# Altium PCB Modulo_Led_RGB.PcbDoc
Units mm, origin at the board's own origin, x right, y up, seen from the top; angles counter-clockwise.
Board outline 24 x 24 mm, 2 copper layers (Top Layer, Bottom Layer); 5 components, 13 nets, 20 pads, 0 vias.
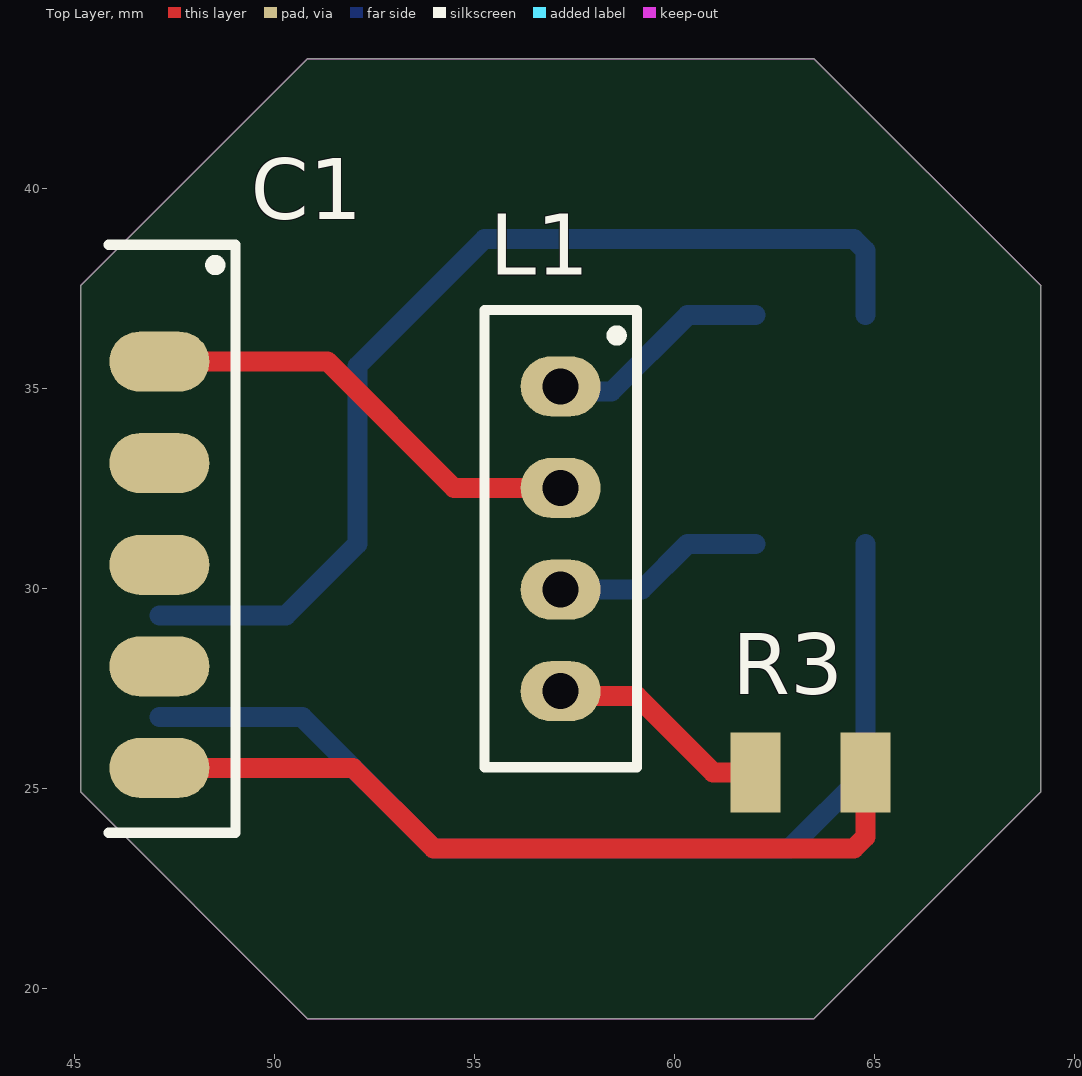
[diagram p0: Top Layer view]
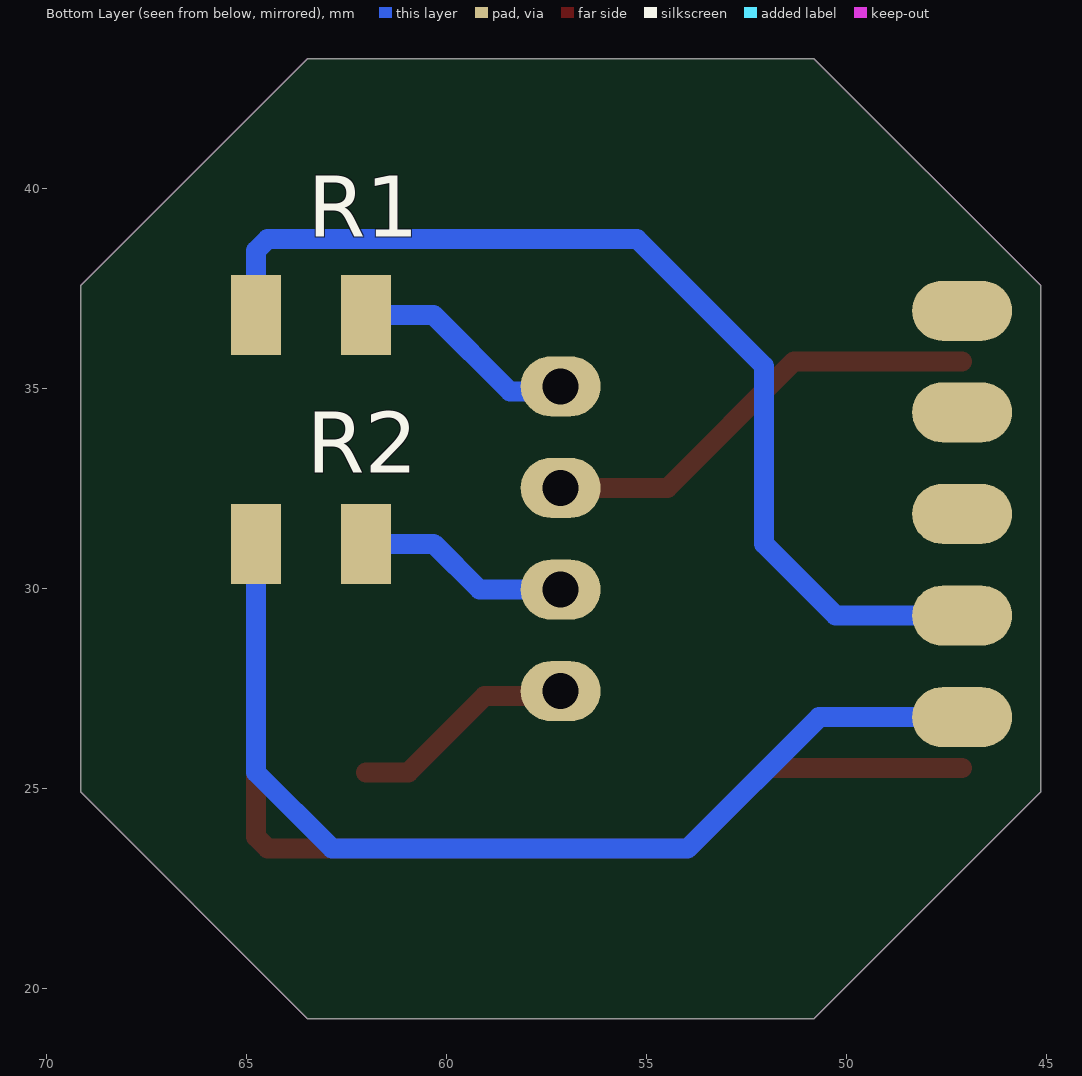
[diagram p1: Bottom Layer view, seen from below]

## Layer stack, top to bottom
Top Solder: solder mask 0.0102, Solder Resist, Dk 3.5
Top Layer: signal copper 0.0356
Dielectric 1: dielectric 0.32, FR-4, Dk 4.8
Bottom Layer: signal copper 0.0356
Bottom Solder: solder mask 0.0102, Solder Resist, Dk 3.5

## Board outline
45.15,24.91 45.15,37.574 50.818,43.242 63.482,43.242 69.15,37.574 69.15,24.91 63.482,19.242 50.818,19.242

## Design rules (kind name [scope] priority, off if disabled: settings)
Clearance [All] p1: gap=0.254 ignorepadtopadclearanceinfootprint=FALSE except(0: Arc-Hole Track-Hole SMDPad-Hole THPad-Hole Via-Hole Fill-Hole Poly-Hole Region-Hole Text-Hole)
PolygonConnect [All] p1: connectstyle=Relief reliefconductorwidth=0.254 reliefentries=4 polygonreliefangle="90 Angle" airgapwidth=0.254
RoutingVias [All] p1: holewidth=0.711 width=1.27 viastyle="Through Hole" minholewidth=0.711 minwidth=1.27 maxholewidth=0.711 maxwidth=1.27
SolderMaskExpansion [All] p1: expansion=0.102 istentingtop=FALSE
Width [All] p1: maxlimit=1 minlimit=0.25 preferedwidth=0.5 minimp=50.000000 maximp=50.000000 favimp=50.000000
30 further rules are at their usual default settings.

## Components (designator, comment, footprint, x,y, rotation, side; value= is the part's Value field where it differs from the comment)
C1 "Micro-MaTchF" "Micro-MaTch Famale 1.27mm/SMD" 47.117,36.941 r270 top locked
L1 "RGB_ Anod" "Led 5mm - RGB" 57.15,35.052 r270 top
R1 "Res" "1206 (3216)" 64.77,36.83 r180 bottom value=220
R2 "Res" "1206 (3216)" 64.77,31.115 r180 bottom value=220
R3 "Res" "1206 (3216)" 64.77,25.4 r180 top value=220

## Footprints (in the part's own frame and the unit in brackets; to place one, negate y for a bottom-side part, rotate by r counter-clockwise, add the part's x,y. Pads: shape width x height; smd on the part's side, far side on the other; paste and mask are expansions set on the pad)
"1206 (3216)" [mm]
  rect 1.25x2 smd mask+0.2: 1(0,0) 2(2.75,0)
  body extent -0.25,-0.8 2.95,0.86, height 0.53
"Led 5mm - RGB" [mm]
  oval 1.5x2 hole 0.9 mask+0.2: 1(0,0) 2(2.54,0) 3(5.08,0) 4(7.62,0)
  silkscreen extent -1.91,-1.91 9.53,1.91
"Micro-MaTch Famale 1.27mm/SMD" [mm]
  round 0 / inner oval 1.5x2.5 / far side oval 1.5x2.5 all layers, no hole mask+0.2: 1(0,0) 3(2.54,0) 5(5.08,0) 7(7.62,0) 9(10.16,0)
  oval 1.5x2.5 / inner oval 1.5x2.5 / far side round 0 all layers, no hole mask+0.2: 2(1.27,0) 4(3.81,0) 6(6.35,0) 8(8.89,0) 10(11.43,0)
  silkscreen extent -1.65,-1.27 13.05,1.91, body extent -1.47,-6.6 13.16,0.55, height 2.6

## Part data
C1: "Micro-MaTch Famale 1.27mm T/Hole"
L1: "Typical BLUE SiC LED"
R1 R2 R3: library part Res2, "Resistor", Autor="Borxo García"

## Nets (pads, with @x,y where several pads share a name; then routed paths per layer and width w, separated by ;. In a path a pad name is that pad's centre, name@x,y a point inside that pad or via, vN(x,y) a via of type N, cw(c..) or ccw(c..) an arc to the next point about the centre after c; other vN are vias at no path point)
NetC1_1: C1.1
NetC1_2: C1.2 L1.2 | length 11.3
  Top Layer w0.5: C1.2 51.324,35.671 54.483,32.512 L1.2
NetC1_3: C1.3
NetC1_4: C1.4
NetC1_5: C1.5
NetC1_6: C1.6
NetC1_7: C1.7 R1.1 | length 25.9
  Bottom Layer w0.5: C1.7 50.276,29.321 52.07,31.115 52.07,35.56 55.245,38.735 64.477,38.735 64.77,38.442 R1.1
NetC1_8: C1.8
NetC1_9: C1.9 R2.1 | length 25.5
  Bottom Layer w0.5: C1.9 50.689,26.781 53.975,23.495 62.865,23.495 64.77,25.4 R2.1
NetC1_10: C1.10 R3.1 | length 20.2
  Top Layer w0.5: C1.10 51.959,25.511 53.975,23.495 64.477,23.495 64.77,23.788 R3.1
NetL1_1: L1.1 R1.2 | length 5.7
  Bottom Layer w0.5: L1.1 57.277,34.925 58.42,34.925 60.325,36.83 R1.2
NetL1_3: L1.3 R2.2 | length 5.3
  Bottom Layer w0.5: L1.3 59.182,29.972 60.325,31.115 R2.2
NetL1_4: L1.4 R3.2 | length 5.7
  Top Layer w0.5: L1.4 57.277,27.305 59.055,27.305 60.96,25.4 R3.2

## Keep-outs
Keep-Out Layer:
  the board outline again, w0.013

## Silkscreen, mask and mechanical layers (free items; w line width, h text height)
Autocad:
  lines w0.013: 40.15,22.742 40.15,39.742 44.15,39.742 44.15,22.742 40.15,22.742 ; 44.15,24.496 50.404,18.242 63.896,18.242 70.15,24.496 70.15,37.988 63.896,44.242 50.404,44.242 44.15,37.988 44.15,24.496 ; 45.15,24.91 50.818,19.242 63.482,19.242 69.15,24.91 69.15,37.574 63.482,43.242 50.818,43.242 45.15,37.574 45.15,24.91 ; 70.15,22.742 70.15,39.742 74.15,39.742 74.15,22.742 70.15,22.742